# EAGLE board BatteryPrintV1 (EAGLE 5.12)
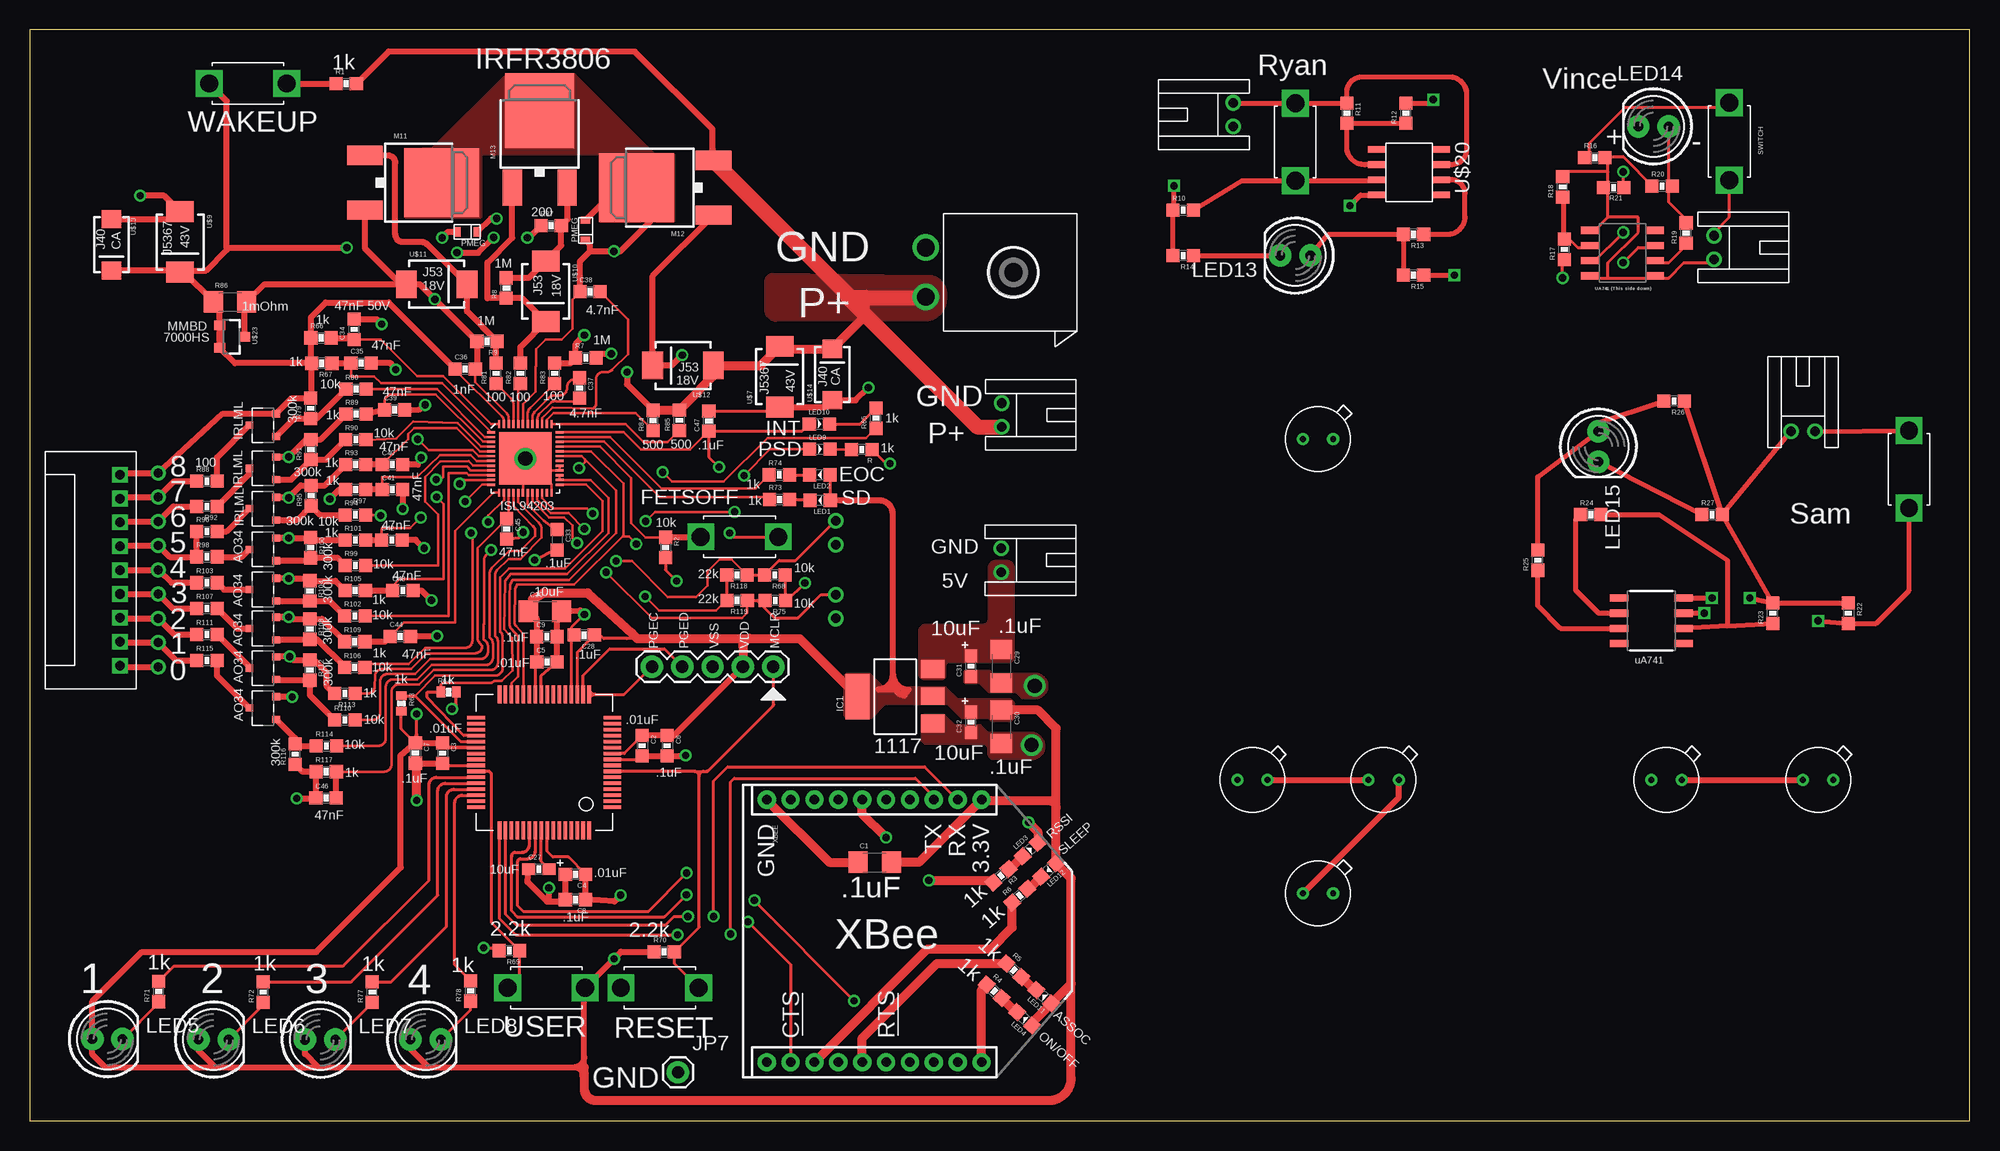
[diagram p0: board, top side]
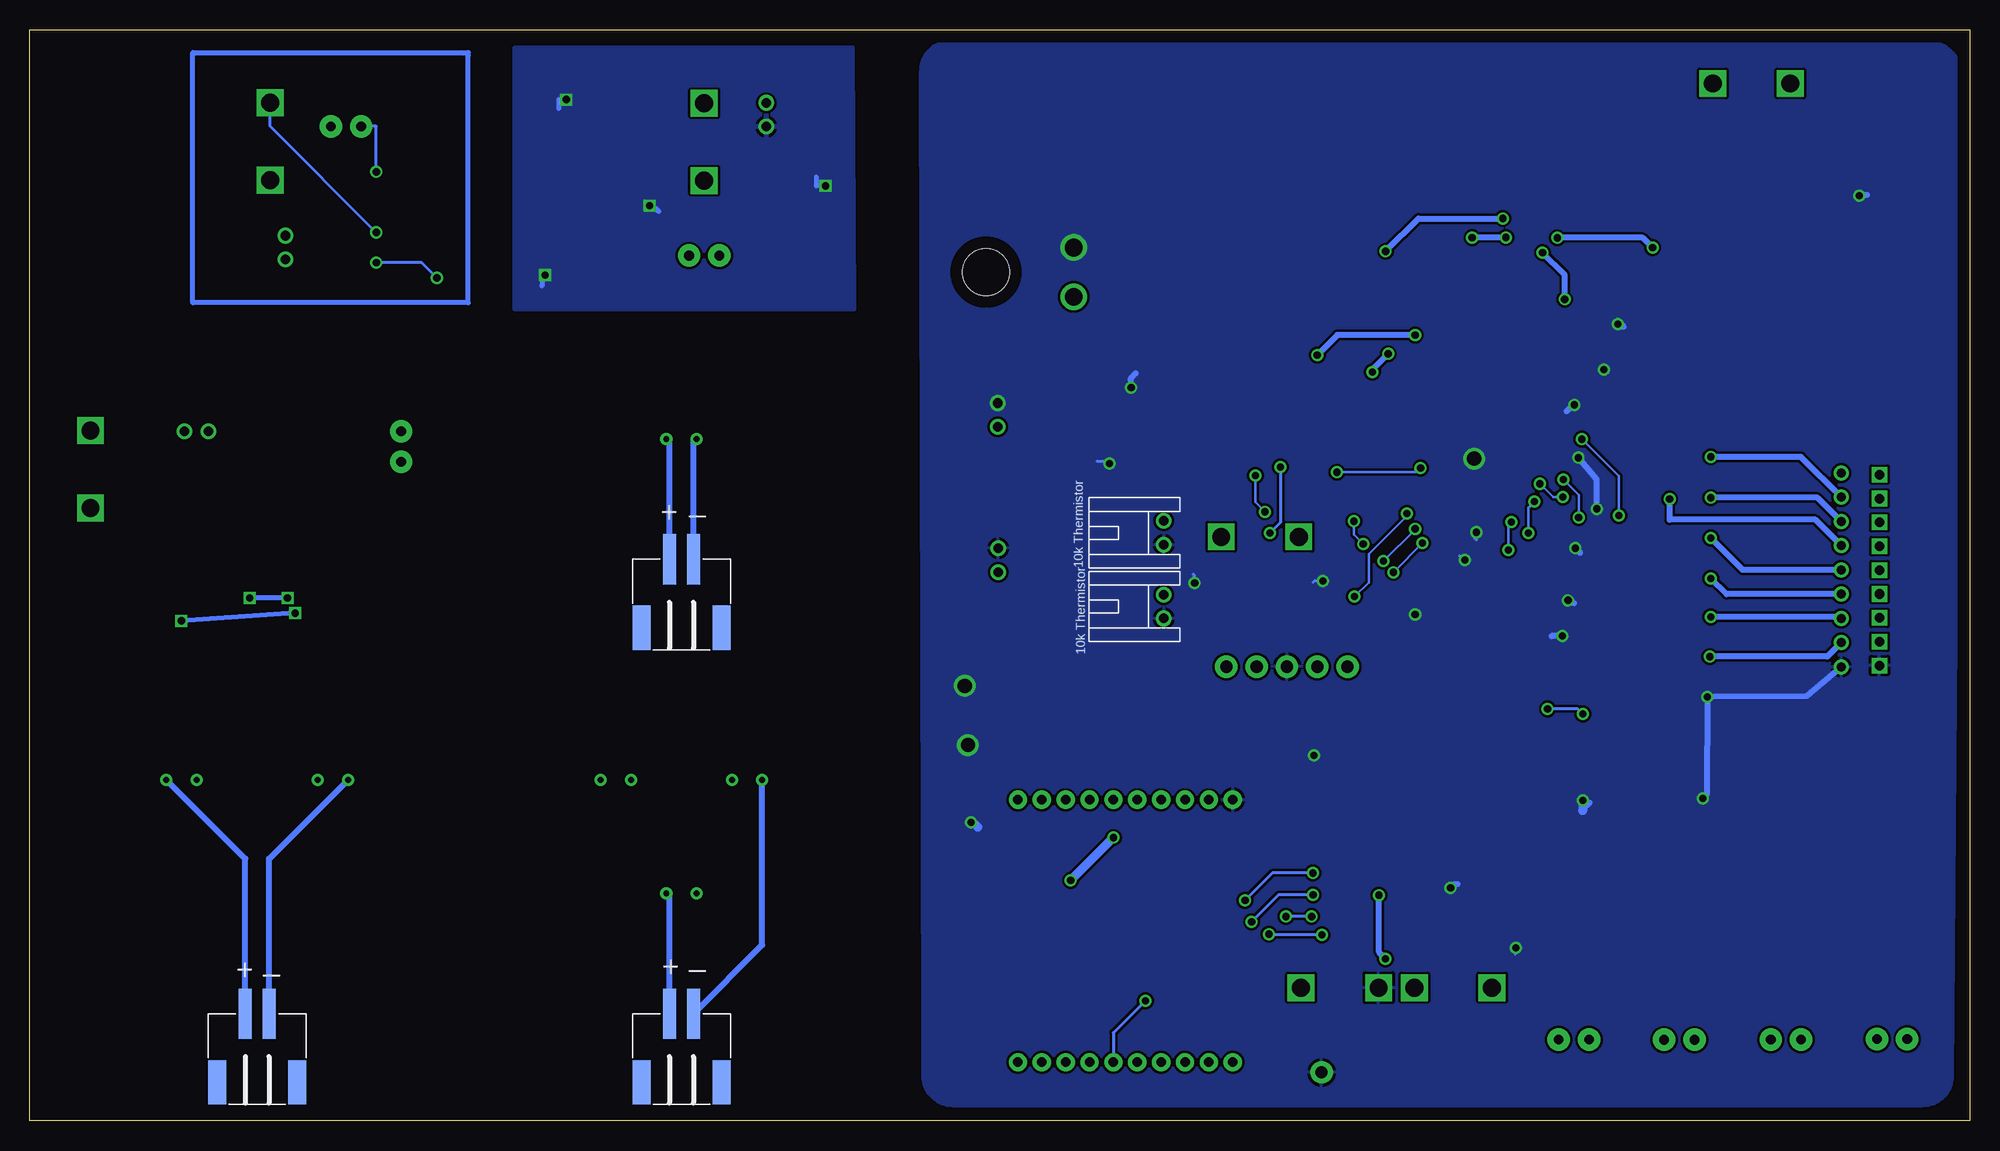
[diagram p1: board, bottom side, seen from below]

Size 162.56 x 91.44 mm. Coordinates in mm from the lower left corner, seen from the top.
Outline: 162.56,91.44 0,91.44 0,0 162.56,0 162.56,91.44
Copper layers (1*16): Top 0.035mm / dielectric 1.5mm / Bottom 0.035mm
Design rules "default": minimum track width 10mil, minimum drill 24mil, track to track 8mil, track to pad 8mil, pad to pad 8mil, via to via 8mil, smd to smd 8mil, copper to edge 40mil, drill to drill 8mil, minimum pad ring 10mil, minimum via ring 8mil, stop-mask expansion 4mil, vias tented up to drill 0mil, thermal gap 10mil

## Footprints (pad centres in the part's own frame; a part is rotated, then mirrored left to right if it is on the bottom)
1206 = smd 1.6 x 1.8: 1 -1.4,0; 2 1.4,0
0603 = smd 1.1 x 1.1: 1 -0.85,0; 2 0.85,0
0603-POL = smd 1.1 x 1: + 0.85,0; - -0.85,0
SOT223 = smd 1.499 x 2.007: 1 -2.261,-3.15; 2 0.025,-3.15; 3 2.311,-3.15 | smd 3.81 x 2.007: 4 0,3.15
TE-MINIMATENLOK-2 = drill 1.48 round: 1 -2.07,12.67; 2 2.07,12.67 | hole 3.91: 0,5.33
1X01_TEST = drill 0.762 round: 1 0,0
1X01 = drill 1.016 pad 1.88 round: 1 0,0
JST-2-PH-TH = drill 0.8 round: 1 -1,-6.35; 2 1,-6.35
1X05-PICKIT3 = drill 1.016 pad 1.88 round: MCLR 1.27,-1.016; PGEC 11.43,-1.016; PGED 8.89,-1.016; VDD 3.81,-1.016; VSS 6.35,-1.016
JST-2-PH-SMD = smd 1.1 x 4.2: 1 -1,-7.7; 2 1,-7.7 | smd 1.5 x 3.7: P$1 -3.35,-1.95; P$4 3.35,-1.95
0603-DIODE = smd 1.1 x 1.1: AN -0.85,0; CAT 0.85,0
LED5MM = drill 0.813 pad 1.88 round: A -1.27,0; K 1.27,0
DPAK = smd 5.791 x 6.274: D 0,1.587 | smd 1.6 x 3: G -2.286,-4.851; S 2.286,-4.851
SOT23F = smd 0.6 x 0.65: D 0,1.125; G -0.95,-1.125; S 0.95,-1.125
0402 = smd 0.7 x 0.9: 1 -0.65,0; 2 0.65,0
TACTILE_SWITCH = drill 1.5 square: 1 -3.25,0; 2 3.25,0
JST-9-PH = drill 0.8 square: P$1 -8,0; P$2 -6,0; P$3 -4,0; P$4 -2,0; P$5 0,0; P$6 2,0; P$7 4,0; P$8 6,0; P$9 8,0
TQFP64_10X10 = smd 1.5 x 0.3: 1 -5.7,3.75; 2 -5.7,3.25; 3 -5.7,2.75; 4 -5.7,2.25; 5 -5.7,1.75; 6 -5.7,1.25; 7 -5.7,0.75; 8 -5.7,0.25; 9 -5.7,-0.25; 10 -5.7,-0.75; 11 -5.7,-1.25; 12 -5.7,-1.75; 13 -5.7,-2.25; 14 -5.7,-2.75; 15 -5.7,-3.25; 16 -5.7,-3.75; 33 5.7,-3.75; 34 5.7,-3.25; 35 5.7,-2.75; 36 5.7,-2.25; 37 5.7,-1.75; 38 5.7,-1.25; 39 5.7,-0.75; 40 5.7,-0.25; 41 5.7,0.25; 42 5.7,0.75; 43 5.7,1.25; 44 5.7,1.75; 45 5.7,2.25; 46 5.7,2.75; 47 5.7,3.25; 48 5.7,3.75 | smd 0.3 x 1.5: 17 -3.75,-5.7; 18 -3.25,-5.7; 19 -2.75,-5.7; 20 -2.25,-5.7; 21 -1.75,-5.7; 22 -1.25,-5.7; 23 -0.75,-5.7; 24 -0.25,-5.7; 25 0.25,-5.7; 26 0.75,-5.7; 27 1.25,-5.7; 28 1.75,-5.7; 29 2.25,-5.7; 30 2.75,-5.7; 31 3.25,-5.7; 32 3.75,-5.7; 49 3.75,5.7; 50 3.25,5.7; 51 2.75,5.7; 52 2.25,5.7; 53 1.75,5.7; 54 1.25,5.7; 55 0.75,5.7; 56 0.25,5.7; 57 -0.25,5.7; 58 -0.75,5.7; 59 -1.25,5.7; 60 -1.75,5.7; 61 -2.25,5.7; 62 -2.75,5.7; 63 -3.25,5.7; 64 -3.75,5.7
OPTITRACK = drill 0.5 round: A 1.27,0; C -1.27,0
TQFPNL-48 = smd 0.65 x 0.2: 1 -2.875,2.2; 2 -2.875,1.8; 3 -2.875,1.4; 4 -2.875,1; 5 -2.875,0.6; 6 -2.875,0.2; 7 -2.875,-0.2; 8 -2.875,-0.6; 9 -2.875,-1; 10 -2.875,-1.4; 11 -2.875,-1.8; 12 -2.875,-2.2; 25 2.875,-2.2; 26 2.875,-1.8; 27 2.875,-1.4; 28 2.875,-1; 29 2.875,-0.6; 30 2.875,-0.2; 31 2.875,0.2; 32 2.875,0.6; 33 2.875,1; 34 2.875,1.4; 35 2.875,1.8; 36 2.875,2.2 | smd 0.2 x 0.65: 13 -2.2,-2.875; 14 -1.8,-2.875; 15 -1.4,-2.875; 16 -1,-2.875; 17 -0.6,-2.875; 18 -0.2,-2.875; 19 0.2,-2.875; 20 0.6,-2.875; 21 1,-2.875; 22 1.4,-2.875; 23 1.8,-2.875; 24 2.2,-2.875; 37 2.2,2.875; 38 1.8,2.875; 39 1.4,2.875; 40 1,2.875; 41 0.6,2.875; 42 0.2,2.875; 43 -0.2,2.875; 44 -0.6,2.875; 45 -1,2.875; 46 -1.4,2.875; 47 -1.8,2.875; 48 -2.2,2.875 | smd 4.4 x 4.4: PAD 0,0
SMB-DIODE = smd 1.75 x 2.3: A -2.54,0; C 2.54,0
SMA-DIODE = smd 1.52 x 1.63: A -2.15,0; C 2.15,0
SOIC = smd 0.55 x 1.5: 1 -1.905,-2.7; 2 -0.635,-2.7; 3 0.635,-2.7; 4 1.905,-2.7; 5 1.905,2.7; 6 0.635,2.7; 7 -0.635,2.7; 8 -1.905,2.7
UA741-D(R-PDSO-G8) = smd 1.55 x 0.6: 1 -2.7,1.905; 2 -2.7,0.635; 3 -2.7,-0.635; 4 -2.7,-1.905; 5 2.7,1.905; 6 2.7,0.635; 7 2.7,-0.635; 8 2.7,-1.905
SOT23-3 = smd 0.8 x 0.9: 1 -0.95,-1; 2 0.95,-1; 3 0,1.1
SOD-523 = smd 0.6 x 0.8: A 0.85,0; C -0.85,0
UA741 = smd 1.55 x 0.6: 1 -2.7,1.905; 2 -2.7,0.635; 3 -2.7,-0.635; 4 -2.7,-1.905; 5 2.7,-1.905; 6 2.7,-0.635; 7 2.7,0.635; 8 2.7,1.905
XBEE-SILK = drill 0.8 pad 1.524 round: 1 -11,20; 2 -11,18; 3 -11,16; 4 -11,14; 5 -11,12; 6 -11,10; 7 -11,8; 8 -11,6; 9 -11,4; 10 -11,2; 11 11,2; 12 11,4; 13 11,6; 14 11,8; 15 11,10; 16 11,12; 17 11,14; 18 11,16; 19 11,18; 20 11,20

## Placement (x,y rotation side)
C1  .1uF  [1206]  70.8,21.67 0 top
C2  .01uF  [0603]  51.32,31.45 270 top
C3  .01uF  [0603]  34.58,30.81 270 top
C4  .01uF  [0603]  45.73,20.66 180 top
C5  .01uF  [0603]  43.35,38.44 0 top
C6  .1uF  [0603]  53.42,31.45 270 top
C7  .1uF  [0603]  32.31,30.82 270 top
C8  .1uF  [0603]  45.73,18.54 180 top
C9  .1uF  [0603]  43.33,40.58 0 top
C10  10uF  [1206]  43.18,42.72 0 top
C27  10uF  [0603-POL]  42.66,21.09 0 top
C28  .1uF  [0603]  46.46,40.7 180 top
C29  .1uF  [1206]  81.41,38.1 270 top
C30  .1uF  [1206]  81.41,33.02 270 top
C31  10uF  [0603-POL]  78.87,38.1 90 top
C32  10uF  [0603-POL]  78.87,33.4 90 top
C33  .1uF  [0603]  44.18,48.7 270 top
C34  47nF 50V  [0603]  27.18,66.33 90 top
C35  47nF  [0603]  27.76,63.5 0 top
C36  1nF  [0603]  36.49,63.02 0 top
C37  4.7nF  [0603]  46.06,61.42 270 top
C38  4.7nF  [0603]  46.95,69.48 0 top
C39  47nF  [0603]  30.57,59.59 0 top
C40  47nF  [0603]  30.39,54.99 0 top
C41  47nF  [0603]  30.39,52.9 0 top
C42  47nF  [0603]  30.34,48.68 0 top
C43  47nF  [0603]  31.27,44.44 0 top
C44  47nF  [0603]  31.04,40.6 0 top
C45  47nF  [0603]  39.97,49.61 270 top
C46  47nF  [0603]  24.83,27.05 0 top
C47  .1uF  [0603]  56.9,58.65 90 top
IC1  REG1117  [SOT223]  72.52,35.56 90 top
JP1  [TE-MINIMATENLOK-2]  87.76,71.12 90 top
JP2  VC8  [1X01_TEST]  10.77,54.31 0 top
JP3  VC7  [1X01_TEST]  10.77,52.27 0 top
JP4  VC6  [1X01_TEST]  10.77,50.24 0 top
JP5  VC5  [1X01_TEST]  10.77,48.21 0 top
JP6  VC4  [1X01_TEST]  10.77,46.18 0 top
JP7  GND TEST  [1X01]  54.32,4.06 0 top
JP8  5V Input  [JST-2-PH-TH]  87.76,46.99 270 top
JP9  [1X05-PICKIT3]  63.56,37.05 180 top
JP10  Thermistor-10k  [JST-2-PH-TH]  73.89,49.28 90 bottom
JP11  Thermistor-10k  [JST-2-PH-TH]  73.89,43.1 90 bottom
JP12  VC3  [1X01_TEST]  10.77,44.15 0 top
JP13  VC2  [1X01_TEST]  10.77,42.11 0 top
JP14  VC1  [1X01_TEST]  10.77,40.08 0 top
JP15  VC0  [1X01_TEST]  10.77,38.05 0 top
JP16  [JST-2-PH-TH]  87.78,59.16 270 top
JP17  3  [JST-2-PH-SMD]  107.95,1.27 180 bottom
JP18  2  [JST-2-PH-SMD]  143.51,1.27 180 bottom
JP19  1  [JST-2-PH-SMD]  107.95,39.37 180 bottom
JP20  [JST-2-PH-TH]  94.49,84.33 90 top
JP21  [JST-2-PH-TH]  148.59,64.14 0 top
LED1  SD1  [0603-DIODE]  66.23,52.01 180 top
LED2  EOC1  [0603-DIODE]  66.21,54.14 180 top
LED3  [0603-DIODE]  83.83,22.73 42 top
LED4  [0603-DIODE]  83.36,8.53 138 top
LED5  [LED5MM]  6.5,6.85 0 top
LED6  [LED5MM]  15.39,6.81 0 top
LED7  [LED5MM]  24.33,6.79 0 top
LED8  [LED5MM]  33.17,6.81 0 top
LED9  [0603-DIODE]  66.21,56.29 0 top
LED10  [0603-DIODE]  66.17,58.41 0 top
LED11  [0603-DIODE]  84.98,10.4 138 top
LED12  [0603-DIODE]  85.37,21.02 222 top
LED13  [LED5MM]  106.05,72.52 180 top
LED14  [LED5MM]  136.06,83.35 180 top
LED15  [LED5MM]  131.44,56.52 270 top
M11  IRFR1018ETRPBF  [DPAK]  32.93,78.63 270 top
M12  IRFR1018ETRPBF  [DPAK]  52.44,78.21 90 top
M13  IRFR1018ETRPBF  [DPAK]  42.72,83.07 0 top
M14  AO3418  [SOT23F]  19.52,44.53 90 top
M15  AO3418  [SOT23F]  19.52,41.26 90 top
M16  AO3418  [SOT23F]  19.52,37.93 90 top
M17  AO3418  [SOT23F]  19.52,34.59 90 top
P5  IRLML6401PBFCT-ND  [SOT23F]  19.52,58.31 90 top
P6  IRLML6401PBFCT-ND  [SOT23F]  19.52,54.69 90 top
P7  IRLML6401PBFCT-ND  [SOT23F]  19.52,51.31 90 top
P8  AO3418  [SOT23F]  19.52,47.89 90 top
PH-JST-TH  [JST-2-PH-TH]  147.49,73.19 270 top
R  1k  [0603]  69.72,56.27 180 top
R1  1k  [0603]  26.52,86.93 0 top
R2  10k  [0603]  53.26,48.06 270 top
R3  1k  [0603]  81.38,20.54 222 top
R4  1k  [0603]  80.81,10.86 318 top
R5  1k  [0603]  82.46,12.62 318 top
R6  1k  [0603]  82.96,18.87 42 top
R7  1M  [0603]  46.6,63.94 0 top
R8  1M  [0603]  39.93,69.8 90 top
R9  1M  [0603]  38.32,65.33 180 top
R10  1k  [0603]  96.65,76.33 0 top
R11  1k  [0603]  110.36,84.45 270 top
R12  1k  [0603]  115.32,84.45 90 top
R13  100  [0603]  115.95,74.3 180 top
R14  1k  [0603]  96.65,72.52 180 top
R15  1k  [0603]  115.95,70.87 180 top
R16  1K  [0603]  131.14,80.73 0 top
R17  1K  [0603]  128.59,73.04 90 top
R18  1K  [0603]  128.44,78.27 90 top
R19  100  [0603]  138.8,74.4 90 top
R20  1K  [0603]  136.79,78.35 0 top
R21  1K  [0603]  132.72,78.21 180 top
R22  1000  [0603]  152.4,42.55 270 top
R23  1000  [0603]  146.05,42.55 90 top
R24  1000  [0603]  130.81,50.8 0 top
R25  100  [0603]  126.36,46.99 90 top
R26  1000  [0603]  137.79,60.33 180 top
R27  [0603]  140.97,50.8 0 top
R63  1k  [0402]  31.13,34.98 270 top
R64  1k  [0402]  35.09,35.94 0 top
R65  1k  [0603]  70.9,58.89 90 top
R66  1k  [0603]  24.41,65.62 0 top
R67  1k  [0603]  24.46,63.49 180 top
R68  10k  [0603]  62.43,45.75 180 top
R69  2.2k  [0603]  40.18,14.26 180 top
R70  2.2k  [0603]  53.16,14.16 0 top
R71  1k  [0603]  10.81,10.85 90 top
R72  1k  [0603]  19.56,10.79 90 top
R73  1k  [0603]  62.83,52.08 0 top
R74  1k  [0603]  62.8,54.14 0 top
R75  10k  [0603]  62.47,43.61 180 top
R77  1k  [0603]  28.7,10.79 90 top
R78  1k  [0603]  36.93,10.88 90 top
R79  330k  [0603]  23.53,59.72 90 top
R80  10k  [0603]  27.34,61.32 0 top
R81  100  [0603]  39.07,62.65 90 top
R82  100  [0603]  41.11,62.65 90 top
R83  100  [0603]  43.98,62.65 90 top
R84  500  [0603]  52.24,58.7 90 top
R85  500  [0603]  54.43,58.71 90 top
R86  1mOhm  [1206]  16.79,68.64 0 top
R87  200  [0603]  43.69,75.02 0 top
R88  100  [0603]  14.85,53.61 0 top
R89  1k  [0603]  27.34,59.22 0 top
R90  10k  [0603]  27.32,57.09 0 top
R91  330k  [0603]  23.56,56.26 90 top
R92  100  [0603]  14.85,51.5 180 top
R93  1k  [0603]  27.3,54.99 0 top
R94  10k  [0603]  27.28,50.79 0 top
R95  330k  [0603]  23.58,52.4 90 top
R96  100  [0603]  14.85,49.39 0 top
R97  1k  [0603]  27.3,52.9 180 top
R98  100  [0603]  14.85,47.27 0 top
R99  10k  [0603]  27.28,46.55 0 top
R100  330k  [0603]  23.55,48.04 270 top
R101  1k  [0603]  27.28,48.67 0 top
R102  10k  [0603]  27.24,42.32 0 top
R103  100  [0603]  14.85,45.1 0 top
R104  330k  [0603]  23.47,44.41 270 top
R105  1k  [0603]  27.27,44.44 0 top
R106  10k  [0603]  27.23,37.99 0 top
R107  100  [0603]  14.85,42.95 0 top
R108  330k  [0603]  23.47,41.21 270 top
R109  1k  [0603]  27.23,40.16 0 top
R110  10k  [0603]  26.4,33.59 0 top
R111  100  [0603]  14.85,40.77 0 top
R112  330k  [0603]  23.47,37.78 270 top
R113  1k  [0603]  26.4,35.81 180 top
R114  10k  [0603]  24.85,31.42 0 top
R115  100  [0603]  14.85,38.6 0 top
R116  330k  [0603]  22.24,30.72 90 top
R117  1k  [0603]  24.84,29.26 0 top
R118  22k  [0603]  59.26,45.76 180 top
R119  22k  [0603]  59.27,43.62 180 top
RESET  TACTILE_SWITCH  [TACTILE_SWITCH]  52.78,11.15 180 top
SWITCH  TACTILE_SWITCH  [TACTILE_SWITCH]  142.41,82.08 90 top
U$1  JST-9-PH  [JST-9-PH]  7.56,46.15 90 top
U$2  WAKEUP  [TACTILE_SWITCH]  18.28,86.94 0 top
U$3  DSPIC33EP512MC806  [TQFP64_10X10]  43.12,30.04 180 top
U$4  OPTITRACK  [OPTITRACK]  107.95,19.05 0 top
U$5  OPTITRACK  [OPTITRACK]  113.45,28.57 0 top
U$6  [TQFPNL-48]  41.53,55.51 0 top
U$7  SMBJ5367B-TP 43V  [SMB-DIODE]  62.84,62.37 90 top
U$8  FETSOFF  [TACTILE_SWITCH]  59.47,48.95 0 top
U$9  SMBJ5367B-TP 43V  [SMB-DIODE]  12.6,73.66 270 top
U$10  SMBJ5355B-TP 18V  [SMB-DIODE]  43.23,69.52 270 top
U$11  SMBJ5355B-TP 18V  [SMB-DIODE]  34.1,70.12 0 top
U$12  SMBJ5355B-TP 18V  [SMB-DIODE]  54.74,63.31 180 top
U$13  SMAJ40CA-13-F  [SMA-DIODE]  6.85,73.42 270 top
U$14  SMAJ40CA-13-F  [SMA-DIODE]  67.25,62.55 90 top
U$15  OPTITRACK  [OPTITRACK]  102.45,28.57 0 top
U$16  OPTITRACK  [OPTITRACK]  149.86,28.57 0 top
U$17  OPTITRACK  [OPTITRACK]  137.16,28.57 0 top
U$18  OPTITRACK  [OPTITRACK]  107.95,57.15 0 top
U$19  TACTILE_SWITCH  [TACTILE_SWITCH]  106.05,82.04 270 top
U$20  UA741UA741-D(R-PDSO-G8)  [SOIC]  115.57,79.5 270 top
U$21  TACTILE_SWITCH  [TACTILE_SWITCH]  157.48,54.61 90 top
U$22  UA7411  [UA741-D(R-PDSO-G8)]  135.89,41.91 180 top
U$23  MMBD7000HS-7-F  [SOT23-3]  16.9,65.72 270 top
U$24  PMEG6002EB  [SOD-523]  46.57,74.64 90 top
U$25  PMEG6002EB  [SOD-523]  36.65,74.51 180 top
UA741(R-PDSO-G8)  UA741  [UA741]  133.47,72.73 0 top
USER  TACTILE_SWITCH  [TACTILE_SWITCH]  43.28,11.15 180 top
XBEE  XBEETH  [XBEE-SILK]  59.75,15.91 270 top

## Library data of the parts
C1-C10 C27-C32 C34-C47 IC1 JP1-JP20 LED1-LED14 M14-M17 P5-P8 PH-JST-TH R R1-R21 R63-R75 R77-R119 RESET SWITCH U$2 U$3 U$7-U$14 U$19 U$23-U$25 USER XBEE = GibbotV5
C33 M11-M13 U$6 = Gibbot v4
JP21 LED15 R22-R27 U$21 = GibbotV5 (1)
U$1 U$4 U$5 U$15-U$18 = GibbotV6
U$20 = practice
U$22 = SLAM
UA741(R-PDSO-G8) = vince

## Nets
3.3V: C1.2 C2.1 C3.1 C4.1 C5.1 C6.1 C7.1 C8.1 C9.1 C10.1 C28.1 C30.1 C32.+ IC1.2 IC1.4 JP9.VDD LED1.AN LED2.AN LED4.AN LED5.A LED6.A LED7.A LED8.A LED11.AN LED12.AN R63.2 R64.2 R70.1 U$3.10 U$3.19 U$3.26 U$3.38 U$3.57 USER.1 XBEE.1
5V: C29.1 C31.+ IC1.3 JP8.2
5V1: R17.1 UA741(R-PDSO-G8).7
5V2: R24.1 U$22.7
CTS: U$3.54 XBEE.12
EOC: R74.1 U$6.35
GND: C1.1 C2.2 C3.2 C4.2 C5.2 C6.2 C7.2 C8.2 C9.2 C10.2 C27.- C28.2 C29.2 C30.2 C31.- C32.- C33.2 C34.2 C35.2 C39.2 C40.2 C41.2 C42.2 C43.2 C44.2 C45.2 C46.1 C47.2 IC1.1 JP1.2 JP7.1 JP8.1 JP9.VSS JP10.1 JP11.1 JP15.1 JP16.1 LED3.CAT M17.S R2.2 R68.1 R69.2 R75.1 R116.1 R117.1 R.1 RESET.2 U$1.P$1 U$3.9 U$3.20 U$3.25 U$3.41 U$6.18 U$6.24 U$6.28 U$6.29 U$6.PAD U$7.A U$9.A U$13.A U$14.A XBEE.10
GND1: JP20.1 R10.1 R12.2 R14.2 R15.1 U$20.4
GND2: PH-JST-TH.2 R16.2 R18.2 R20.1 R21.2 UA741(R-PDSO-G8).1 UA741(R-PDSO-G8).4 UA741(R-PDSO-G8).5
GND3: JP21.1 R22.1 R23.2 R26.1 R27.2 U$22.4
INT: R65.1 U$3.30 U$6.31
LED1: R71.2 U$3.43
LED2: R72.2 U$3.44
LED3: R77.2 U$3.45
LED4: R78.2 U$3.46
MCLR: JP9.MCLR R70.2 RESET.1 U$3.7
N$1: R1.1 U$2.2
N$2: R2.1 U$6.33 U$8.1
N$3: R4.1 XBEE.20
N$4: U$4.C U$5.A
N$5: LED3.AN R3.1
N$6: R3.2 XBEE.6
N$7: U$5.C U$15.A
N$8: LED4.CAT R4.2
N$9: LED11.CAT R5.2
N$10: LED12.CAT R6.2
N$11: R5.1 XBEE.15
N$12: R6.1 XBEE.13
N$13: JP17.2 U$4.A
N$14: JP17.1 U$15.C
N$15: JP18.2 U$16.A
N$16: JP18.1 U$17.C
N$17: U$16.C U$17.A
N$18: JP19.2 U$18.A
N$19: JP19.1 U$18.C
N$20: JP20.2 R11.1 U$19.1 U$20.7
N$21: R10.2 U$19.2 U$20.3
N$22: R11.2 R12.1 U$20.2
N$23: R13.1 U$20.6
N$24: LED13.A R13.2 R15.2
N$25: LED13.K R14.1
N$26: PH-JST-TH.1 SWITCH.1
N$27: R16.1 SWITCH.2 UA741(R-PDSO-G8).3
N$28: R17.2 R18.1 UA741(R-PDSO-G8).2
N$29: R19.1 UA741(R-PDSO-G8).6
N$30: LED14.A R19.2 R20.2
N$31: LED14.K R21.1
N$33: JP21.2 U$21.2
N$34: R22.2 U$21.1 U$22.3
N$35: C27.+ U$3.56
N$36: R23.1 R24.2 U$22.2
N$37: R25.1 U$22.6
N$38: LED15.A R25.2 R26.2
N$39: LED15.K R27.1
N$40: C36.2 M11.S R9.2 R86.2 R87.1 U$6.46 U$11.A U$23.3
N$41: M11.D M12.D M13.D U$24.A
N$86: LED5.K R71.1
N$90: LED10.CAT R65.2
N$91: LED9.CAT R.2
N$92: C33.1 U$6.19
N$93: C34.1 R66.2 U$6.48
N$94: C35.1 R67.1 U$6.1
N$96: LED1.CAT R73.2
N$97: LED6.K R72.1
N$98: LED2.CAT R74.2
N$99: LED7.K R77.1
N$102: LED8.K R78.1
N$105: R80.2 U$6.2
N$106: P5.G R79.1 R80.1
N$107: C39.1 R89.2 U$6.3
N$110: M11.G R9.1 R81.2 U$11.C
N$111: M13.G R8.1 R82.2 U$10.C
N$112: C38.1 U$6.43 U$24.C U$25.C
N$113: M12.G R7.1 R83.2 U$12.C
N$114: C37.1 U$6.41
N$115: C37.2 U$6.40
N$116: C38.2 U$6.39
N$117: R84.1 U$6.38
N$118: R85.1 U$6.37
N$119: M13.S R8.2 R87.2 U$10.A
N$120: P5.D R88.2
N$121: R90.2 U$6.4
N$123: P6.G R90.1 R91.1
N$124: P6.D R92.1
N$126: P7.G R94.1 R95.1
N$127: R94.2 U$6.6
N$128: C40.1 R93.2 U$6.5
N$129: P7.D R96.2
N$130: C41.1 R97.1 U$6.7
N$132: P8.D R98.2
N$133: R99.2 U$6.8
N$134: P8.G R99.1 R100.2
N$135: C42.1 R101.2 U$6.9
N$137: R102.2 U$6.10
N$138: M14.G R102.1 R104.2
N$139: M14.D R103.2
N$140: C43.1 R105.2 U$6.11
N$142: R106.2 U$6.12
N$143: M15.G R106.1 R108.2
N$144: M15.D R107.2
N$145: C44.1 R109.2 U$6.13
N$147: M16.G R110.1 R112.2
N$148: R110.2 U$6.14
N$149: M16.D R111.2
N$150: C45.1 R113.1 U$6.15
N$152: R114.2 U$6.16
N$153: M17.G R114.1 R116.2
N$154: M17.D R115.2
N$155: C46.2 R117.2 U$6.17
N$156: R81.1 U$6.45
N$157: R82.1 U$6.44
N$158: R83.1 U$6.42
N$159: R118.2 R119.2 U$6.22
N$160: JP11.2 R75.2 R119.1 U$6.20
N$161: JP10.2 R68.2 R118.1 U$6.21
P+: JP1.1 JP16.2 M12.S R1.2 R7.2 R84.2 R85.2 U$7.C U$12.A U$14.C
PGEC1: JP9.PGEC U$3.17
PGED1: JP9.PGED U$3.18
PSD: LED9.AN U$3.28 U$6.32
RGO: C47.1 LED10.AN U$6.36 U$8.2
RTS: U$3.55 XBEE.16
RX: U$3.50 XBEE.2
SCL: R63.1 U$3.37 U$6.25
SD: R73.1 U$6.34
SDA: R64.1 U$3.36 U$6.26 U$6.27
TX: U$3.49 XBEE.3
USER: R69.1 U$3.42 USER.2
VC1: JP14.1 M16.S R112.1 R113.2 R115.1 U$1.P$2
VC2: JP13.1 M15.S R108.1 R109.1 R111.1 U$1.P$3
VC3: JP12.1 M14.S R104.1 R105.1 R107.1 U$1.P$4
VC4: JP6.1 P8.S R100.1 R101.1 R103.1 U$1.P$5
VC5: JP5.1 R96.1 R97.2 R98.1 U$1.P$6
VC6: JP4.1 P7.S R92.2 R93.1 R95.2 U$1.P$7
VC7: JP3.1 P6.S R88.1 R89.1 R91.2 U$1.P$8
VC8: C36.1 JP2.1 P5.S R66.1 R67.2 R79.2 R86.1 U$1.P$9 U$2.1 U$6.47 U$9.C U$13.C U$23.1 U$23.2 U$25.A

## Tracks (layer width: path | path; a pad name or v marks a point on that pad's centre or on a via)
3.3V  (via drill 0.6)
  Top 0.203: R64.2 35.74,35.71 35.75,35.7 | LED4.AN 83.99,8.23 87.26,11.49
  Top 0.254: U$3.10 49.81,30.79 C2.1 | C3.1 34.96,31.29 U$3.38 34.69,31.29 34.29,31.69 33.27,31.69 | U$3.57 43.37,22.57 43.83,22.11 45.13,22.11 C4.1 46.58,20.56 | C5.1 42.37,38.49 U$3.26 42.37,39.04 42.53,39.2 | 45.87,39.26 U$3.19 | 45.87,39.26 C28.1 | 45.87,39.26 | 47.36,40.75 47.38,40.78 | 47.36,40.75 45.87,39.26 | 47.36,40.75 47.52,40.75 47.52,40.99 48.09,40.42 50.9,40.42 | 50.48,40.85 arc-90 50.05,40.42 | 33.27,31.69 32.32,31.69 32.3,31.66 | R64.2 35.74,34.89 v35.37,34.52 | 31.96,32.02 C7.1 32.41,31.77 | 31.96,32.02 31.13,32.85 R63.2 | 31.96,32.02 arc90 32.41,32.47 | v32.41,34.11 32.41,32.55 arc90 33.27,31.69 | 72.78,35.8 arc90 72.91,35.67 73.22,35.67 arc90 73.66,36.12 | LED1.AN 67.08,54.12 LED2.AN
  Top 0.508: 15.54,4.48 6.31,4.48 5.23,5.56 LED5.A 5.23,9.99 9.38,14.15 24.02,14.15 31.09,21.22 31.06,30.61 C7.1 32.32,31.66 C3.1 | 15.54,4.48 24.18,4.48 | 24.18,4.48 33.41,4.48 | LED6.A 14.12,5.91 15.54,4.48 | LED7.A 23.06,5.6 24.18,4.48 | LED8.A 31.9,5.99 33.41,4.48 | C2.1 C6.1 53.99,32.3 JP9.VDD | 46.46,3.94 46.46,5.33 | 46.46,5.33 arc-90 45.61,4.48 | 33.41,4.48 45.66,4.48 arc-90 46.46,3.68 | 46.46,5.33 46.46,11.08 USER.1 v48.96,13.58 49.54,14.16 R70.1 | 46.58,20.56 C8.1 48.98,18.39 v49.51,18.91 | C9.1 42.49,40.69 C5.1 42.49,42.07 42.12,42.44 C10.1 | LED1.AN 71.16,52.01 arc-90 72.33,50.84 72.33,37.39 arc-90 71.09,36.16 72.44,36.16 arc-90 72.45,36.14 72.45,36.68 arc90 72.4,36.73 72.4,36.59 arc90 73.33,35.66 | 72.33,37.45 arc90 73.66,36.12
  Top 0.762: C1.2 74.51,21.67 XBEE.1 arc90 79.84,26.82 85.43,26.82 arc-90 86,26.25 | LED4.AN 83.99,8.22 LED11.AN 87.26,11.49 | 46.43,4.48 arc-90 46.46,4.46 46.46,3.94 46.46,3.68 46.46,2.68 arc90 47.43,1.7 85.39,1.7 arc90 87.26,3.57 87.26,11.49 87.26,20.33 LED12.AN 86,26.25 | JP9.VDD 59.75,39.76 arc-90 60.41,40.42 | IC1.4 64.5,40.42 60.41,40.42 | 60.41,40.42 50.9,40.42 50.48,40.85 46.75,44.25 43.05,44.25 42.12,43.7 42.12,42.44 | 86,26.25 86,32.9 84.47,34.43 C30.1
  Bottom 0.254: v35.37,34.52 32.82,34.52 v32.41,34.11
  Bottom 0.508: v49.51,18.91 49.51,14.12 v48.96,13.58
  pour Top (no thermals): 69.22,37.47 70.36,37.47 71.5,36.32 76.07,36.32 76.71,36.32 77.72,35.31 82.04,35.31 arc-90 82.42,34.92 82.42,33.91 arc-90 82.04,33.53 80.64,33.53 80.39,33.78 78.11,33.78 76.96,34.92 71.63,34.92 70.48,33.78 68.58,33.78 arc-90 68.33,34.04 68.33,37.21 arc-90 68.58,37.47
5V
  pour Top (no thermals): 74.55,41.02 74.55,37.47 arc90 74.93,37.08 76.45,37.08 arc90 76.71,37.34 76.71,38.23 arc-90 76.96,38.48 82.04,38.48 arc90 82.42,38.86 82.42,46.35 arc90 81.92,46.86 80.9,46.86 arc90 80.39,46.35 80.39,42.04 arc-90 79.88,41.53 75.18,41.53 arc90
5V1  (via drill 0.61)
  Top 0.254: v128.44,70.65 128.44,71.92 R17.1 | v133.52,71.92 134.79,73.19 136.06,73.19 UA741(R-PDSO-G8).7
  Bottom 0.254: v128.44,70.65 129.71,71.92 v133.52,71.92
5V2
  Top 0.406: U$22.7 131.44,42.55 129.54,44.45 129.54,50.38 R24.1
CTS  (via drill 0.6)
  Top 0.254: U$3.54 41.87,23.14 arc-90 41.23,22.5 40.64,22.5 arc90 40.39,22.15 40.39,17.58 40.86,17.11 53.17,17.11 v55.02,18.95 | v60.17,16.69 63.75,13.11 XBEE.12
  Bottom 0.254: v55.02,18.95 57.91,18.95 v60.17,16.69
EOC
  Top 0.203: U$6.35 48.62,57.31 52.92,53.01 60.82,53.01 R74.1
GND  (via drill 0.6, 1.2)
  Top 0.203: U$6.29 U$6.28 42.52,54.51 v41.53,55.5 | U$6.18 41.33,55.31 U$6.PAD 43.73,53.31 U$6.24
  Top 0.254: 51.35,30.29 C2.2 51.01,30.29 U$3.9 | U$3.41 34.76,29.79 C3.2 | R69.2 39.09,14.5 v38.04,14.5 | U$3.25 42.87,37.29 C5.2 | 45.37,40.46 U$3.20 | 45.37,40.46 C28.2 | 45.37,40.46 45.37,41.33 v46.47,42.43 | C45.2 40.97,48.87 v41.33,49.33 | R2.2 53.26,46.18 v54.19,45.25 | C33.2 44.08,47.93 v42.3,47.02 | R68.1 63.32,45.71 R75.1 63.48,43.61 v64.95,45.09 | R.1 71.75,55.09 v72.08,55.09 | C47.2 62.51,59.5 U$7.A | U$6.PAD v41.53,55.5
  Top 0.508: C2.2 C6.2 54.93,30.59 v54.95,30.62 | C3.2 32.32,29.96 C7.2 | C4.2 C8.2 arc-90 44.87,18.38 43.34,18.38 | 43.34,18.38 43.5,18.53 v43.5,19.53 | C27.- 41.71,20.01 43.34,18.38 | C5.2 44.2,40.69 C9.2 44.18,42.39 C10.2 46.11,42.79 v46.47,42.43 | JP15.1 7.66,38.05 U$1.P$1 | M17.S 21.38,35.55 v22,35.53 | R116.1 22.85,29.26 R117.1 23.98,29.25 C46.1 23.95,27.03 v22.36,27.03 | C44.2 31.89,40.63 v34.14,40.63 | C43.2 32.84,44.44 v33.66,43.62 | C39.2 32.64,59.61 v33.12,60.01 | C41.2 31.25,52.88 v31.25,51.3 | v32.78,55.58 32.51,54.99 C40.2 | C35.2 30.24,63.5 v30.66,62.95 | C34.2 29.08,67.18 v29.49,66.78 | U$13.A 11.97,75.57 U$9.A 11.27,77.53 v9.25,77.53 | U$7.A 66.68,59.83 U$14.A 69.2,60.4 v70.27,61.47 | C42.2 32.35,48.68 v33.03,47.99
  Top 0.762: XBEE.10 67,21.67 C1.1 | LED3.CAT 84.46,24.23 v83.69,25.01 | C7.2 32.41,29.87 v32.41,26.86
  Bottom 0.254: v38.04,14.5 38.09,14.45 38.09,13.96 | v46.47,42.43 46.75,42.43 46.76,42.42 | v41.33,49.33 41.33,48.68 41.49,48.84 | v54.19,45.25 54.89,45.25 55.02,45.12 | v42.3,47.02 42.76,47.37 42.58,47.19 | v64.95,45.09 64.95,45.67 65.09,45.81 | v72.08,55.09 72.26,55.27 73.13,55.27
  Bottom 0.508: v54.95,30.62 54.95,30.91 | v43.5,19.53 43.18,19.85 42.91,19.85 | JP15.1 13.7,35.57 v22,35.53 22.04,27.36 v22.36,27.03 | 32.04,26.47 31.84,26.67 | v34.14,40.63 35.04,40.63 | v33.66,43.62 33.41,43.62 33.16,43.37 | v33.12,60.01 33.57,59.69 33.8,59.46 | v31.25,51.3 31.25,53.73 v32.78,55.58 | v30.66,62.95 30.7,63.03 30.43,62.76 | v29.49,66.78 29.21,66.78 28.99,66.56 | v9.25,77.53 9.16,77.62 8.6,77.62 | v70.27,61.47 70.27,62.27 69.89,62.65 | v33.03,47.99 33.01,47.99 32.63,47.61
  Bottom 0.762: v83.69,25.01 83.53,25.01 83.12,24.6 | v32.41,26.86 32.44,26.84 32.44,25.98
  other vias: 84.2,36.45 83.95,31.5
  pour Bottom: 39.99,90.49 85.41,90.47 arc-90 87.95,87.93 87.76,7.62 87.76,3.81 arc-90 85.22,1.27 3.94,1.27 arc-90 1.4,3.81 0.74,87.82 arc-90 3.28,90.36
  pour Top (no thermals): 81.28,37.47 84.2,37.47 arc-90 85.22,36.45 arc-90 84.2,35.43 83.19,35.43 82.68,35.94 80.39,35.94 79.76,36.58 79.63,36.7 78.74,36.7 78.49,36.7 arc-90 78.36,36.83 78.36,37.59 arc-90 78.49,37.72 80.39,37.72 80.52,37.59 80.64,37.47 81.03,37.47
  pour Top (no thermals): 75.31,34.04 76.58,34.04 77.47,33.15 79.63,33.15 80.26,32.51 83.82,32.51 arc-90 84.96,31.37 arc-90 83.95,30.35 80.77,30.35 arc-90 80.39,30.73 80.39,31.11 arc90 79.88,31.62 75.18,31.62 arc-90 74.8,32 74.8,33.78 arc-90 75.06,34.04
  pour Bottom (no thermals): 74.96,75.08 77.05,75.08 77.05,73.05 77.05,71.31 75.02,71.31 72.99,71.31 72.99,73.28 72.99,75.12 74.35,75.12
  pour Bottom (no thermals): 81.13,61.37 82.73,61.37 82.73,59.98 82.73,59.09 80.49,59.09 80.49,61.4 80.82,61.4
GND1  (via drill 0.6)
  Top 0.406: R14.2 R10.1 95.89,76.33 v95.89,78.36 | R15.1 v119.38,70.87 | R12.2 117.6,85.31 v117.6,85.6 | U$20.4 111.51,77.6 v110.62,76.71
  Bottom 0.406: v95.89,78.36 96.65,78.36 96.65,79.12 | v119.38,70.87 119.63,70.87 119.63,69.98 | v117.6,85.6 118.24,85.6 118.24,84.84 | v110.62,76.71 110.36,76.71 109.86,76.2
  pour Bottom: 93.6,89.92 121.92,89.92 121.92,68.07 93.47,68.07
GND2
  Top 0.254: 132.25,79.54 132.25,80.81 | 132.25,78.27 132.25,79.54 | 132.25,79.54 128.44,79.54 R18.2 | 132.25,80.81 133.52,80.81 136.06,78.27 R20.1 | 132.25,80.81 R16.2 | 132.25,75.73 130.98,74.46 UA741(R-PDSO-G8).1 | 132.25,75.73 132.25,78.27 | 132.25,78.27 R21.2 | 132.25,70.65 136.06,70.65 | 132.25,70.65 130.98,70.65 UA741(R-PDSO-G8).4 | 136.06,70.65 137.33,70.65 138.6,71.92 141.14,71.92 PH-JST-TH.2 | 136.06,70.65 UA741(R-PDSO-G8).5 | 132.25,75.73 134.79,75.73 134.79,74.46 132.25,71.92 132.25,70.65
GND3  (via drill 0.6)
  Top 0.406: R23.2 R22.1 | v144.15,43.81 R23.2 | U$22.4 v140.97,43.81 | R23.2 R27.2 | R27.2 JP21.1 | R27.2 R26.1
  Bottom 0.406: v140.97,43.81 v144.15,43.81
INT  (via drill 0.6)
  Top 0.203: U$6.31 46.26,55.71 46.55,55.42 | 46.55,55.42 49.12,52.84 49.12,49.26 45.2,45.34 40.48,45.34 40.26,44.96 40.22,44.04 40.21,41.79 arc45 40.32,41.25 40.92,40.59 40.92,37.24 40.37,36.68 U$3.30 | v53.02,54.36 53.81,53.57 58.15,53.57 61.81,57.23 70.09,57.23 R65.1 | v46.01,54.7 46.55,55.23 46.55,55.42
  Bottom 0.203: v53.02,54.36 46.35,54.36 v46.01,54.7
LED1
  Top 0.254: U$3.43 34.09,28.79 arc90 33.45,28.15 33.45,20.16 26.28,12.98 12.09,12.98 R71.2
LED2
  Top 0.254: U$3.44 34.82,28.29 arc90 34.19,27.65 34.19,18.9 26.94,11.64 R72.2
LED3
  Top 0.254: U$3.45 35.55,27.79 arc90 34.91,27.15 34.91,16.28 30.28,11.64 R77.2
LED4
  Top 0.254: U$3.46 36.25,27.29 arc90 35.61,26.65 35.61,13.05 R78.2
MCLR
  Top 0.254: 53.01,29.29 arc-90 53.02,29.27 53.02,29.29 | 53.02,29.29 U$3.7 | 55.68,29.29 56.48,29.29 | JP9.MCLR arc-90 62.33,38.02 62.33,34.93 arc-45 62.26,34.75 56.87,29.36 arc-45 56.69,29.29 56.48,29.29 | 56.48,29.29 arc90 56.08,28.89 | 55.68,29.29 arc-90 56.08,28.88 56.08,16.23 R70.2 54.01,13.17 RESET.1 | 55.68,29.29 53.02,29.29
N$1
  Top 0.508: U$2.2 R1.1
N$2
  Top 0.203: U$6.33 47.78,56.51 50.41,53.89 50.41,50.1 51.6,48.91 53.77,48.91 53.81,48.95
  Top 0.508: U$8.1 53.81,48.95 53.3,48.95 R2.1
N$3
  Top 0.762: XBEE.20 79.75,11 R4.1
N$4
  Top 0.508: U$4.C 114.72,27.09 U$5.A
N$5
  Top 0.762: R3.1 82.14,21.11 LED3.AN
N$6  (via drill 0.6)
  Top 0.762: XBEE.6 69.75,25.74 v71.75,23.74 | v75.34,20.16 80.56,20.16 R3.2
  Bottom 0.762: v75.34,20.16 v71.75,23.74
N$7
  Top 0.508: U$15.A U$5.C
N$8
  Top 0.762: LED4.CAT 82.63,9.1 R4.2
N$9
  Top 0.762: LED11.CAT 84.18,10.97 R5.2
N$10
  Top 0.762: R6.2 83.73,19.44 LED12.CAT
N$11
  Top 0.762: XBEE.15 69.75,6.91 76.03,13.19 R5.1
N$12
  Top 0.762: XBEE.13 75.24,14.4 80.53,14.4 82.33,16.2 R6.1
N$13
  Bottom 0.508: JP17.2 108.95,18.78 U$4.A
N$14
  Bottom 0.508: JP17.1 101.18,14.74 U$15.C
N$15
  Bottom 0.508: JP18.2 144.51,21.95 U$16.A
N$16
  Bottom 0.508: JP18.1 142.51,21.95 U$17.C
N$17
  Top 0.508: U$17.A U$16.C
N$18
  Bottom 0.508: JP19.2 108.95,56.88 U$18.A
N$19
  Bottom 0.508: JP19.1 106.95,56.88 U$18.C
N$20
  Top 0.406: JP20.2 arc90 100.87,85.29 U$19.1 106.05,85.31 R11.1 110.36,86.19 arc-90 111.67,87.5 118.95,87.5 arc-90 120.4,86.06 120.4,81.39 arc-90 119.14,80.14 U$20.7
N$21
  Top 0.406: U$20.3 112.87,78.79 U$19.2 101.56,78.79 R10.2
N$22
  Top 0.406: R12.1 R11.2 110.36,81.62 arc90 111.84,80.14 U$20.2
N$23
  Top 0.406: U$20.6 119.12,78.87 arc-90 120.27,77.72 120.27,75.78 arc-90 118.79,74.3 R13.1
N$24
  Top 0.406: LED13.A 108.84,74.3 R13.2 R15.2
N$25
  Top 0.406: R14.1 LED13.K
N$26
  Top 0.254: PH-JST-TH.1 141.14,74.46 142.41,75.73 SWITCH.1
N$27  (via drill 0.61)
  Top 0.254: v133.52,74.46 130.98,71.92 UA741(R-PDSO-G8).3 | R16.1 130.65,80.9 130.65,81.9 133.65,84.9 141.65,84.9 SWITCH.2
  Bottom 0.254: v133.52,74.46 142.41,83.35 SWITCH.2
N$28
  Top 0.254: UA741(R-PDSO-G8).2 130.98,73.19 129.71,73.19 128.44,74.46 R18.1 128.65,76.9 128.65,73.9 R17.2
N$29
  Top 0.254: R19.1 138.6,73.19 137.33,71.92 136.06,71.92 UA741(R-PDSO-G8).6
N$30
  Top 0.254: 137.33,78.27 137.33,77 138.6,75.73 R19.2 | 137.33,78.27 LED14.A | 137.33,78.27 R20.2
N$31  (via drill 0.61)
  Top 0.254: v133.52,79.54 133.52,78.27 R21.1
  Bottom 0.254: v133.52,79.54 133.52,83.35 LED14.K
N$32
  Bottom 0.406: 125.81,89.53 148.89,89.53 148.89,68.56 125.81,68.56 125.81,89.27
N$33
  Top 0.406: JP21.2 U$21.2
N$34  (via drill 0.6)
  Top 0.406: v149.86,41.91 R22.2 154.72,41.7 157.48,44.45 U$21.1 | U$22.3 v140.34,42.55
  Bottom 0.406: v140.34,42.55 v149.86,41.91
N$35
  Top 0.254: U$3.56 42.87,21.74 C27.+
N$36
  Top 0.406: 142.26,41.48 U$22.2 | 142.26,41.48 R23.1 | 142.26,41.48 142.24,41.51 142.24,46.99 136.53,50.8 R24.2
N$37
  Top 0.406: R25.1 126.36,43.18 128.27,41.27 U$22.6
N$38
  Top 0.406: R25.2 126.36,53.98 LED15.A 131.23,58.42 R26.2
N$39
  Top 0.406: LED15.K R27.1
N$40  (via drill 0.6)
  Top 0.203: U$6.46 40.13,58.87 arc45 39.94,59.32 37.34,61.93 C36.2
  Top 0.508: U$11.A 31.06,70.12 28.08,73.1 M11.S | U$11.A 32.68,70.12 v33.94,68.85 R9.2 37.47,63.15 C36.2 | R87.1 41.84,74.02 v41.69,74.02 | v38.86,74.04 37.58,72.76 v35.79,72.76 | U$23.3 18,68.46 R86.2 19.66,70.12 U$11.A
  Bottom 0.508: v41.69,74.02 41.67,74.04 v38.86,74.04 | v35.79,72.76 33.94,70.91 v33.94,68.85
N$41
  Top 0.508: U$24.A 49.29,78.21 M12.D
  pour Top (no thermals): 32.96,81.46 33.72,81.46 39.95,87.69 39.98,87.72 45.61,87.72 52.31,81.01 53.94,81.01 53.94,75.36 49.56,75.36 47.8,75.36 47.8,81.01 37.76,81.01 37.76,77.83 37.76,75.72 31.94,75.72 31.52,75.72 31.52,81.43
N$86
  Top 0.254: R71.1 10.81,9.88 LED5.K
N$90
  Top 0.254: LED10.CAT 69.57,58.41 R65.2
N$91
  Top 0.203: LED9.CAT 67.07,56.27 R.2
N$92
  Top 0.203: U$6.19 41.73,51.65 43.05,50.33 43.95,49.64 C33.1
N$93
  Top 0.203: U$6.48 38.64,58.39 34.62,62.41 32.46,62.41 29.39,65.48 C34.1
  Top 0.508: R66.2 27.18,65.62 C34.1
N$94
  Top 0.203: U$6.1 34.55,61.81 29.44,61.81 28.85,62.4 26.91,62.4 C35.1
  Top 0.508: R67.1 C35.1
N$96
  Top 0.254: R73.2 65.3,52.08 LED1.CAT
N$97
  Top 0.254: R72.1 19.56,9.7 LED6.K
N$98
  Top 0.254: R74.2 LED2.CAT
N$99
  Top 0.254: R77.1 28.7,9.89 LED7.K
N$102
  Top 0.254: R78.1 36.93,9.3 LED8.K
N$105
  Top 0.203: U$6.2 38.12,57.31 34.11,61.32 R80.2
N$106
  Top 0.508: P5.G 22.16,58.87 R79.1 24.04,58.87 R80.1
N$107
  Top 0.203: U$6.3 37.98,56.91 34.01,60.88 30.35,60.88 arc90 29.72,60.25 C39.1
  Top 0.508: C39.1 R89.2
N$110
  Top 0.508: R81.2 39.06,65.23 R9.1 36.64,67.86 U$11.C 33.3,73.46 arc45 32.85,73.65 31.27,73.65 arc-90 30.63,74.28 30.63,80.28 arc90 30,80.91 M11.G
N$111
  Top 0.508: M13.G 40.44,74.02 38.35,71.93 38.35,68.95 R8.1 41.26,68.95 U$10.C 41.11,64.86 R82.2
N$112  (via drill 0.6)
  Top 0.203: U$6.43 41.33,60.06 42.41,61.14 42.41,63.23 42.42,63.25 42.42,64.68 43.22,65.48 44.55,65.48 45.47,66.4 45.47,68.85 C38.1
  Top 0.508: C38.1 46.1,72.03 46.94,72.87 | 46.94,72.87 v48.95,72.87 49.49,72.87 49.69,73.07 52.02,75.4 52.02,78.09 | U$24.C 46.94,73.42 46.94,72.87 | U$25.C 38.62,75.63 v39.12,75.63
  Bottom 0.508: v39.12,75.63 46.19,75.63 v48.95,72.87
N$113  (via drill 0.6)
  Top 0.508: R83.2 45.3,63.5 R7.1 45.75,65.14 v46.47,65.86 | M12.G 52.2,70.83 U$12.C 53.8,63.31 v54.67,64.19
  Bottom 0.508: v54.67,64.19 53,65.86 v46.47,65.86
N$114
  Top 0.203: U$6.41 42.13,58.97 arc-45 42.31,59.42 43.5,60.61 arc-45 43.95,60.8 44.39,60.8 arc90 45.02,61.43 45.02,61.51 arc-90 45.66,62.14 46,62.14 C37.1
N$115
  Top 0.203: U$6.40 42.53,58.67 arc-45 42.69,59.23 43.68,60.22 arc-45 44.15,60.3 45.86,60.3 C37.2
N$116
  Top 0.203: U$6.39 42.93,58.91 43.79,59.77 47.1,59.7 arc90 47.43,60.03 47.43,62.13 arc-90 48.07,62.76 48.37,62.76 arc45 48.81,62.95 50.14,64.28 50.14,67.14 C38.2
N$117
  Top 0.203: U$6.38 43.33,58.77 43.89,59.33 50.78,59.31 R84.1
N$118
  Top 0.203: U$6.37 49.92,58.39 51.42,56.88 53.45,56.88 R85.1
N$119
  Top 0.508: R8.2 41.82,70.65 U$10.A 44.54,73.37 R87.2 45.07,75.55 45.07,78.77 45.01,78.7 M13.S
N$120
  Top 0.508: P5.D 15.7,55.61 R88.2
N$121
  Top 0.203: U$6.4 37.82,56.51 35.87,58.47 32.11,58.59 30.71,57.17 28.18,57.07 R90.2
N$123
  Top 0.508: P6.G 21.88,53.74 R91.1 24.79,55.41 R90.1
N$124
  Top 0.508: P6.D 18.39,54.2 R92.1
N$126
  Top 0.508: P7.G 22.39,50.36 R95.1 24.35,50.79 R94.1
N$127  (via drill 0.6)
  Top 0.203: U$6.6 37.62,55.71 37.1,56.24 33.4,56.24 v32.51,57.12 | R94.2 29.36,50.79 v29.41,50.74
  Bottom 0.203: v29.41,50.74 29.41,54.03 v32.51,57.12
N$128
  Top 0.203: U$6.5 37.72,56.11 35.78,58.05 32.19,58.05 31.69,57.54 31.69,57.14 C40.1
  Top 0.508: C40.1 R93.2
N$129
  Top 0.508: P7.D 16.48,49.39 R96.2
N$130
  Top 0.203: U$6.7 37.44,55.31 36.93,55.82 34.37,55.78 32.47,53.94 29.54,53.94 C41.1
  Top 0.508: C41.1 R97.1
N$132
  Top 0.508: P8.D 17.77,47.27 R98.2
N$133
  Top 0.203: U$6.8 37.14,54.91 36.75,55.3 34.4,55.24 33.13,53.98 33.12,51.92 34.23,50.81 34.23,46.55 R99.2
N$134
  Top 0.508: R99.1 25.78,47.19 R100.2 23.29,46.94 P8.G
N$135  (via drill 0.6)
  Top 0.203: U$6.9 36.95,54.51 36.63,54.84 34.65,54.84 34.65,53.98 34.4,53.73 v34.04,53.73 | v32.77,50.57 31.86,49.67 29.54,49.67 29.49,49.62 C42.1
  Top 0.508: R101.2 C42.1
  Bottom 0.203: v34.04,53.73 32.77,52.46 v32.77,50.57
N$137
  Top 0.203: R102.2 35.12,42.32 35.12,54.3 36.59,54.3 36.78,54.11 U$6.10
N$138
  Top 0.508: M14.G 23.45,43.58 R104.2 25.15,43.56 R102.1
N$139
  Top 0.508: R103.2 16.27,44.53 M14.D
N$140  (via drill 0.6)
  Top 0.203: U$6.11 36.33,53.71 v36.01,53.39 | v34.1,52.27 34.67,51.7 34.67,45.4 30.99,45.4 30.42,44.83 C43.1
  Top 0.508: R105.2 C43.1
  Bottom 0.203: v34.1,52.27 34.89,52.27 v36.01,53.39
N$142  (via drill 0.6)
  Top 0.203: R106.2 28.08,38.29 31.76,38.29 33.11,39.64 36.46,39.64 arc90 37.1,40.27 37.1,49.12 v36.97,49.25 | U$6.12 37.89,53.31 v36.47,51.89
  Bottom 0.203: v36.97,49.25 36.97,51.4 36.87,51.5 v36.47,51.89
N$143
  Top 0.508: M15.G 20.69,40.36 R108.2 24.08,40.36 26.38,38.06 R106.1
N$144
  Top 0.508: R107.2 17.39,41.26 M15.D
N$145
  Top 0.203: U$6.13 38.87,52.64 35.65,49.42 35.65,41.78 31.37,41.78 C44.1
  Top 0.508: R109.2 29.74,40.16 C44.1
N$147
  Top 0.508: M16.G 20.72,36.91 20.75,36.93 R112.2 23.47,35.67 R110.1
N$148  (via drill 0.6)
  Top 0.203: R110.2 28.73,33.59 arc90 29.36,34.23 29.36,36.82 arc-90 30,37.45 32.31,37.45 33.55,38.7 37.76,38.7 arc90 38.39,39.33 38.39,39.76 arc45 38.21,40.2 38.05,40.36 38.05,41.64 38.06,41.66 38.06,46.98 arc-45 38.25,47.43 v38.65,47.83 | U$6.14 39.73,52.03 38.41,50.71 v38.41,50.19
  Bottom 0.203: v38.65,47.83 38.65,49.82 38.65,49.95 v38.41,50.19
N$149
  Top 0.508: R111.2 18.39,38.07 M16.D
N$150
  Top 0.203: R113.1 28.35,35.81 arc90 28.91,36.45 28.92,37.24 arc-90 29.62,37.88 31.94,37.88 33.27,39.18 37.29,39.18 arc90 37.92,39.81 37.7,40.03 arc-45 37.52,40.48 37.52,47.99 C45.1 40.13,50.61 U$6.15
N$152
  Top 0.203: R114.2 29.2,31.42 arc90 29.83,32.05 29.83,36.36 arc-90 30.47,36.99 32.45,36.99 33.66,38.2 38.18,38.2 arc90 38.81,38.84 38.81,39.97 arc45 38.62,40.42 38.53,40.51 38.53,45.86 arc-45 38.72,46.31 40.16,47.75 41.1,47.75 42.35,49.01 42.35,49.5 arc45 42.13,49.87 40.53,51.53 U$6.16
N$153
  Top 0.508: R116.2 arc90 22.09,31.71 | R114.1 22.39,31.42 arc-90 R116.2 | R116.2 22.24,32.05 M17.G
N$154
  Top 0.508: R115.2 15.7,37.29 M17.D
N$155
  Top 0.203: R117.2 29.68,29.26 arc90 30.32,29.9 30.32,35.95 arc-90 30.95,36.59 32.64,36.59 33.83,37.78 38.59,37.78 arc90 39.23,38.42 39.23,40.15 arc45 39.04,40.6 38.99,40.65 38.99,45.71 arc-45 39.17,46.16 40.12,47.1 41.11,47.1 42.89,48.88 42.89,49.58 arc45 42.63,50.13 40.93,51.86 U$6.17
  Top 0.508: C46.2 25.69,27.06 R117.2
N$156
  Top 0.203: U$6.45 40.53,60.07 arc45 40.34,60.52 R81.1
N$157
  Top 0.203: U$6.44 40.93,61.62 R82.1
N$158
  Top 0.203: U$6.42 41.73,59.28 arc-45 41.91,59.73 R83.1
N$159  (via drill 0.6)
  Top 0.203: v51.55,43.94 52.73,42.76 57.51,42.76 58.37,43.62 R119.2 | U$6.22 42.93,52.19 43.79,51.33 46.71,51.33 v47.16,50.89
  Top 0.254: R119.2 58.42,45.74 R118.2
  Bottom 0.203: v47.16,50.89 47.18,50.7 50.35,47.52 50.35,45.14 v51.55,43.94
N$160  (via drill 0.6)
  Top 0.203: v48.3,45.97 52.15,42.13 59.68,42.13 60.12,42.57 R119.1 | v45.86,48.44 45.47,48.83 45.47,49.9 44.79,50.57 43.5,50.57 42.13,51.94 U$6.20
  Top 0.254: R119.1 60.95,43.62 | 60.95,43.62 61.61,43.62 R75.2 | JP11.2 66.32,44.1 64.36,42.15 62.42,42.15 60.95,43.62
  Bottom 0.203: v45.86,48.44 45.86,48.41 v48.3,45.97
N$161  (via drill 0.6)
  Top 0.203: v49.12,46.91 50.46,46.91 53.45,43.92 55.84,43.92 56.79,44.87 56.79,46.05 57.8,47.05 58.81,47.05 R118.1 | U$6.21 42.53,52.09 43.66,50.95 45.14,50.95 v46.47,49.62
  Top 0.254: R118.1 R68.2 62.8,46.97 64.19,46.97 67.53,50.31 JP10.2
  Bottom 0.203: v46.47,49.62 46.47,49.57 v49.12,46.91
P+  (via drill 0.6)
  Top 0.508: U$12.A 57.28,62.41 | R7.2 47.79,64.29 v48.73,64.29 | v50.05,62.75 50.05,61.73 R84.2 | R1.2 30.06,89.62 50.7,89.62 57.2,83.12 57.2,81.53 arc90 57.9,80.83 56.53,80.83 arc90 56.38,80.68 arc90 57.21,81.52 | 57.21,81.52 57.21,82.46 | 57.21,81.52 57.21,80.57 arc90 M12.S
  Top 0.762: 70.04,69.01 70.04,67.49 U$14.C 63.05,64.7 U$7.C 61.24,63.31 57.77,63.31 | 57.77,63.31 U$12.A | R84.2 52.25,59.56 R85.2 57.77,62.9 57.77,63.31
  Top 1.27: JP16.2 79.41,58.16 68.67,68.9 | 68.67,68.9 68.56,69.01 70.04,69.01 75.05,69.01 JP1.1 | M12.S 68.67,69.11 68.67,68.9
  Bottom 0.508: v48.73,64.29 50.05,62.97 v50.05,62.75
  pour Top (no thermals): 74.73,70.82 75.23,70.82 arc-90 76.72,69.33 76.72,68.87 arc-90 74.94,67.09 62.56,67.09 arc-90 61.7,67.96 61.7,70.37 arc-90 62.28,70.95
PGEC1
  Top 0.254: JP9.PGEC 49.81,35.74 47.39,35.74 arc90 46.86,35.2 U$3.17 | 47.4,35.74 arc-90 46.88,36.26 arc90 46.86,36.25 U$3.17 | U$3.17 arc90 U$3.17
PGED1
  Top 0.254: U$3.18 46.37,37.34 48.59,39.56 53.17,39.56 JP9.PGED
PSD  (via drill 0.6)
  Top 0.203: U$3.28 41.38,40.76 40.74,41.47 arc-45 40.63,41.93 40.68,44.56 40.86,44.93 45.62,44.93 49.66,48.97 | 49.66,48.97 49.75,49.06 49.75,53.39 47.02,56.11 U$6.32 | LED9.AN 62.05,56.29 v59.85,54.09 | v59.05,51.04 52.4,51.04 v51.61,50.25 | v50.83,48.35 50.2,48.97 49.66,48.97
  Bottom 0.203: v59.85,54.09 59.85,51.84 v59.05,51.04 | v51.61,50.25 51.61,49.14 v50.83,48.35
RGO  (via drill 0.6)
  Top 0.203: U$6.36 49.76,57.71 51.22,56.25 55.35,56.25 C47.1
  Top 0.254: LED10.AN 64.71,57.8 C47.1 56.9,55.64 v57.75,54.79 | U$8.2 58.95,48.95 v58.65,49.25
  Bottom 0.254: v58.65,49.25 57.75,50.15 v57.75,54.79
RTS  (via drill 0.6)
  Top 0.254: U$3.55 42.37,22.61 arc-90 41.73,21.97 41.15,21.97 arc90 40.89,21.72 40.89,18 41.33,17.56 51.84,17.56 v55.04,20.77 | v60.72,18.48 60.72,18.41 v69.08,10.06
  Bottom 0.254: v55.04,20.77 58.43,20.77 v60.72,18.48 | v69.08,10.06 71.75,7.38 XBEE.16
RX  (via drill 0.6)
  Top 0.254: U$3.50 39.87,17.31 40.75,16.42 53.28,16.42 53.98,17.12 v55.14,17.12 | v57.29,17.12 57.29,28.49 58.48,29.68 74.99,29.68 XBEE.2
  Bottom 0.254: v55.14,17.12 v57.29,17.12
SCL
  Top 0.203: 32.28,35.63 33.97,37.31 39,37.31 arc90 39.64,37.95 39.64,40.52 arc45 39.45,40.97 arc-45 39.4,41.1 39.4,45.53 40.15,46.28 44.84,46.28 47.98,49.42 47.98,51.94 46.61,53.31 U$6.25
  Top 0.254: U$3.37 36.12,31.79 32.28,35.63 R63.1
SD
  Top 0.203: U$6.34 48.14,56.91 52.78,52.27 61.79,52.27 R73.1
SDA
  Top 0.203: U$6.27 U$6.26 46.99,53.71 48.49,52.21 48.49,49.26 45.03,45.81 40.28,45.81 39.81,45.26 39.76,41.21 40.4,40.46 40.45,37.74 39.56,36.91 39.53,36.88 38.92,36.88 38.7,36.72 34.7,36.72 arc90 34.44,36.4 R64.1
  Top 0.254: U$3.36 36.37,32.28 33.31,35.5 33.31,35.93 33.38,35.94 R64.1
TX  (via drill 0.6)
  Top 0.254: U$3.49 39.37,16.95 40.72,15.6 v54.28,15.6 | v58.71,15.65 58.71,28.38 59.03,28.7 74.22,28.7 76.22,26.7
  Top 0.406: 76.22,26.7 75.75,26.7 XBEE.3
  Bottom 0.254: v54.28,15.6 58.66,15.6 v58.71,15.65
USER
  Top 0.254: U$3.42 38.42,29.29 arc-90 38.68,29.02 38.68,16.61 R69.1 41.03,12.15 USER.2
VC1  (via drill 0.6)
  Top 0.508: U$1.P$2 7.63,40.08 JP14.1 12.26,38.59 R115.1 | M16.S 20.95,38.91 v21.77,38.9 22.04,38.63 R112.1 | R112.1 23.75,38.35 | R113.2 25.48,35.81 24.84,36.45 24.84,37.62 23.83,38.63 R112.1
  Bottom 0.508: v21.77,38.9 11.95,38.9 JP14.1
VC2  (via drill 0.6)
  Top 0.508: U$1.P$3 7.59,42.11 JP13.1 12.12,40.77 R111.1 | M15.S 21.16,42.23 v21.68,42.23 21.84,42.06 R108.1 24.48,42.06 R109.1
  Bottom 0.508: v21.68,42.23 10.88,42.23 JP13.1
VC3  (via drill 0.6)
  Top 0.508: U$1.P$4 JP12.1 11.96,42.95 R107.1 | M14.S 20.96,45.48 v21.68,45.47 23.27,45.47 R104.1 | R104.1 23.51,45.26 | R105.1 25.59,45.26 R104.1
  Bottom 0.508: JP12.1 20.36,44.15 v21.68,45.47
VC4  (via drill 0.6)
  Top 0.508: U$1.P$5 7.58,46.18 JP6.1 11.85,45.1 R103.1 | P8.S 20.66,48.83 v21.68,48.83 23.48,48.83 R100.1 23.77,48.67 R101.1
  Bottom 0.508: JP6.1 19.02,46.18 v21.68,48.83
VC5  (via drill 0.6)
  Top 0.508: U$1.P$6 7.61,48.21 JP5.1 11.71,47.27 R98.1 R96.1 | R97.2 25.92,52.9 v25.15,52.12
  Bottom 0.508: v25.15,52.12 25.15,50.38 12.94,50.38 JP5.1
VC6  (via drill 0.6)
  Top 0.508: U$1.P$7 7.65,50.24 JP4.1 12.03,51.5 R92.2 | P7.S 20.68,52.22 v21.68,52.22 22.71,53.25 R95.2 24.71,53.25 R93.1
  Bottom 0.508: v21.68,52.22 12.75,52.22 JP4.1
VC7  (via drill 0.6)
  Top 0.508: U$1.P$8 7.68,52.27 JP3.1 12.1,53.61 R88.1 | P6.S 20.79,55.65 v21.68,55.65 23.14,57.11 R91.2 24.38,57.11 R89.1
  Bottom 0.508: v21.68,55.65 14.15,55.65 JP3.1
VC8  (via drill 0.6)
  Top 0.203: U$6.47 39.73,58.61 arc45 39.54,59.06 35.64,62.9 C36.1
  Top 0.508: U$1.P$9 7.71,54.3 JP2.1 16.18,59.26 P5.S 21.95,60.56 R79.2 23.61,60.64 R67.2 | R67.2 23.52,63.49 | R67.2 23.56,63.54 R66.1 23.56,67.35 24.79,68.58 30.07,68.58 C36.1 | 12.45,71.27 U$13.C | 12.45,71.27 U$9.C 12.91,71.12 R86.1 15.9,68.13 U$23.1 U$23.2 17.19,63.49 R67.2 | U$2.1 16.5,85.47 16.5,73 | 16.5,73 14.77,71.27 12.45,71.27 | U$25.A 35.05,74.51 v34.54,74 | v26.57,73.18 16.68,73.18 16.5,73
  Bottom 0.508: v34.54,74 27.39,74 v26.57,73.18

## Text on the board
tPlace: 1k | IRFR3806 | Ryan | Vince | WAKEUP | + | - | SWITCH | 200 | PMEG | PMEG | J40 | CA | J5367 | 43V | 1M | GND | J53 | 18V | UA741 (This side down) | J53 | 18V | 1mOhm | 47nF 50V | 4.7nF | 1k | 1M | P+ | MMBD | 7000HS | 47nF | 1M | 1k | J53 | 18V | J40 | CA | 10k | 47nF | 1nF | J5367 | 43V | 100 | 100 | 100 | GND | 1k | 4.7nF | 1k | 300k | IRLML | 10k | INT | P+ | 47nF | 500 | 500 | .1uF | PSD | 1k | 100 | 300k | 1k | 8 | EOC | IRLML | 1k | 1k | 7 | 47nF | FETSOFF | 1k | SD | 300k | ISL94203 | 6 | IRLML | 10k | 47nF | 10k | Sam | 1k | 5 | 300k | GND | AO34 | 47nF | 4 | 300k | 10k | .1uF | 10k | 47nF | 22k | 5V | 10uF | 3 | AO34 | 1k | 22k | 10k | 300k | 10k | 2 | 10uF | .1uF | AO34 | .1uF | 1 | 300k | 1k | 47nF | .1uF | 10k | .01uF | 0 | AO34 | 1k | 1k | 1k | AO34 | 10k | .01uF | .01uF | 10k | 1117 | 300k | 10uF | 1k | .1uF | .1uF | .1uF | 47nF | RSSI | SLEEP | 10uF | .01uF | .1uF | 1k | .1uF | 2.2k | 1k | 2.2k | 1k | XBee | 1k | 1k | 1k | 1k | 1k | 1 | 2 | 3 | 4 | ASSOC | USER | RESET | ON/OFF | GND
bPlace: 10k Thermistor | _ | + | 10k Thermistor | _ | _ | + | +